# Altium PCB board.PcbDoc
Units mm, origin at the board's own origin, x right, y up, seen from the top; angles counter-clockwise.
Board outline 130 x 90 mm, 2 copper layers (Top Layer, Bottom Layer); 52 components, 31 nets, 126 pads, 0 vias.
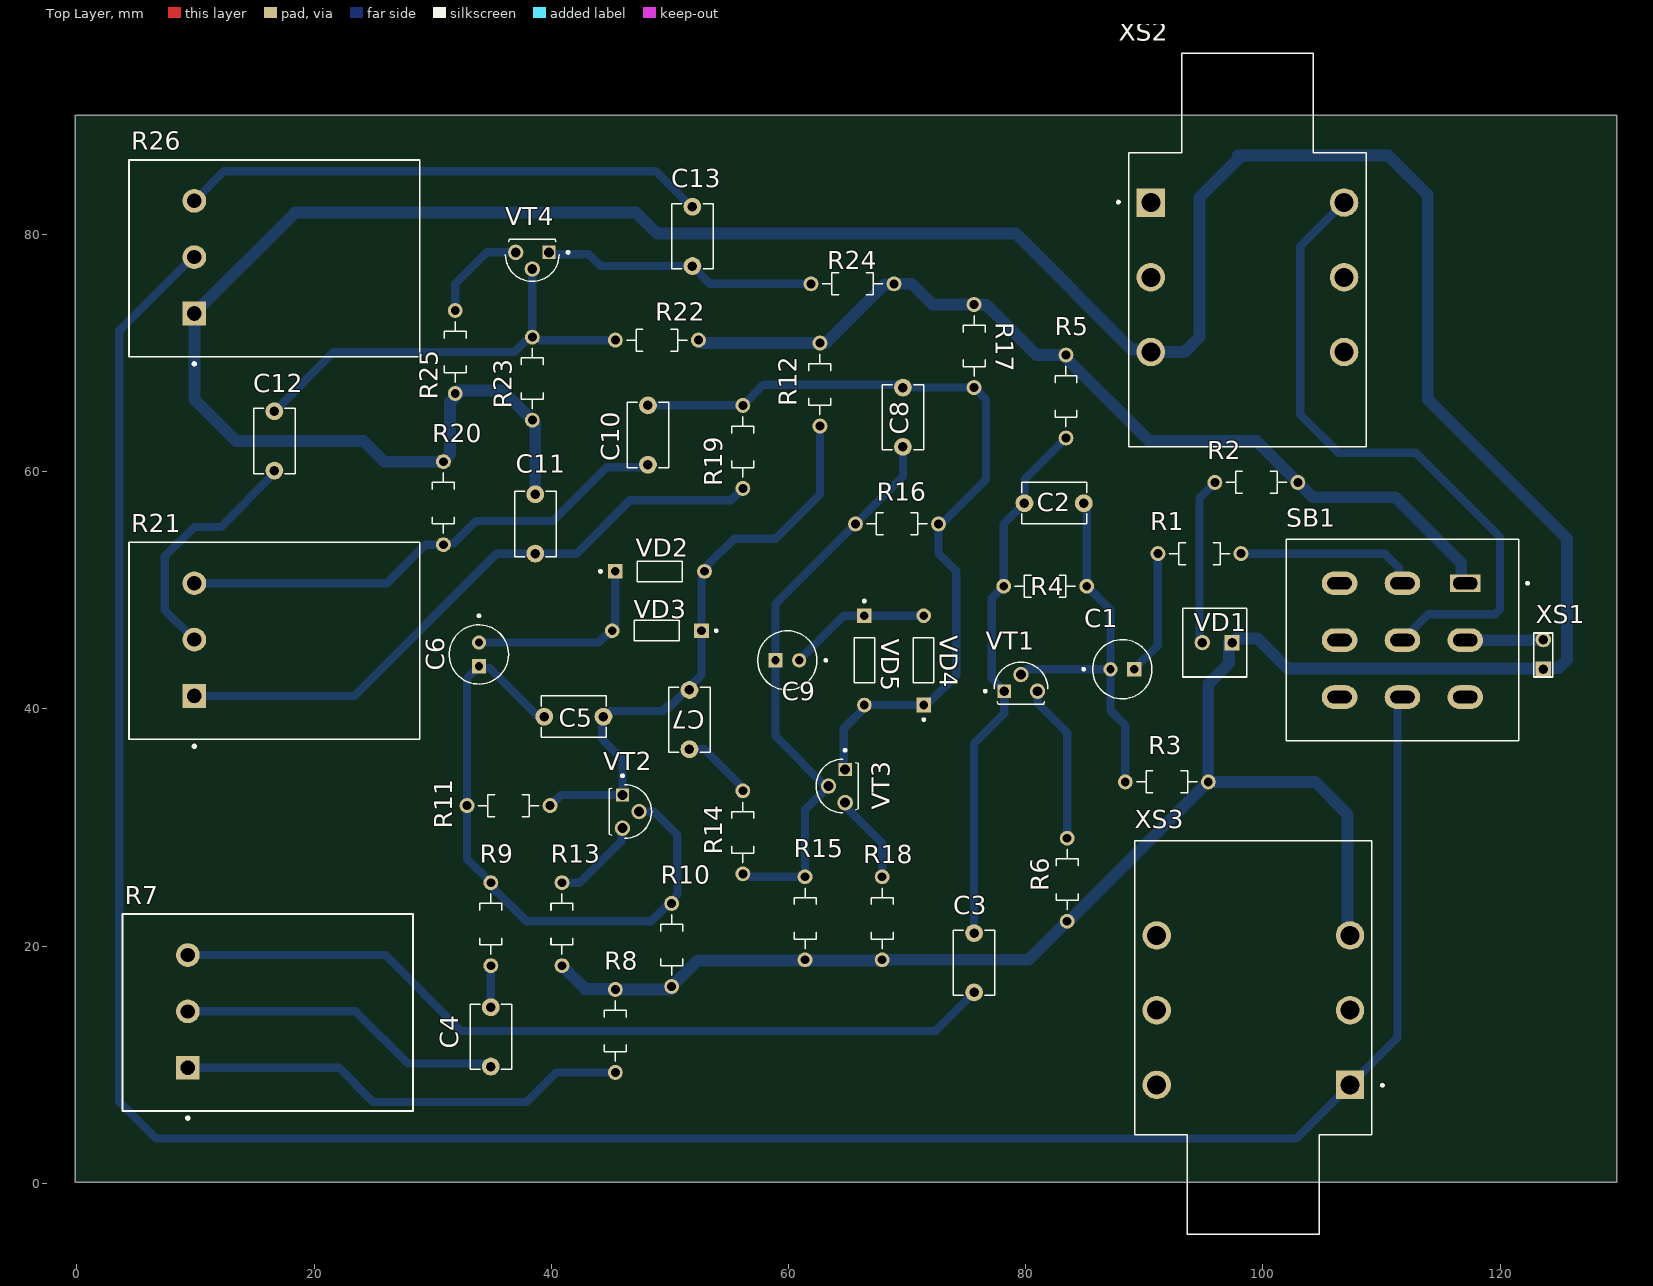
[diagram p0: Top Layer view]
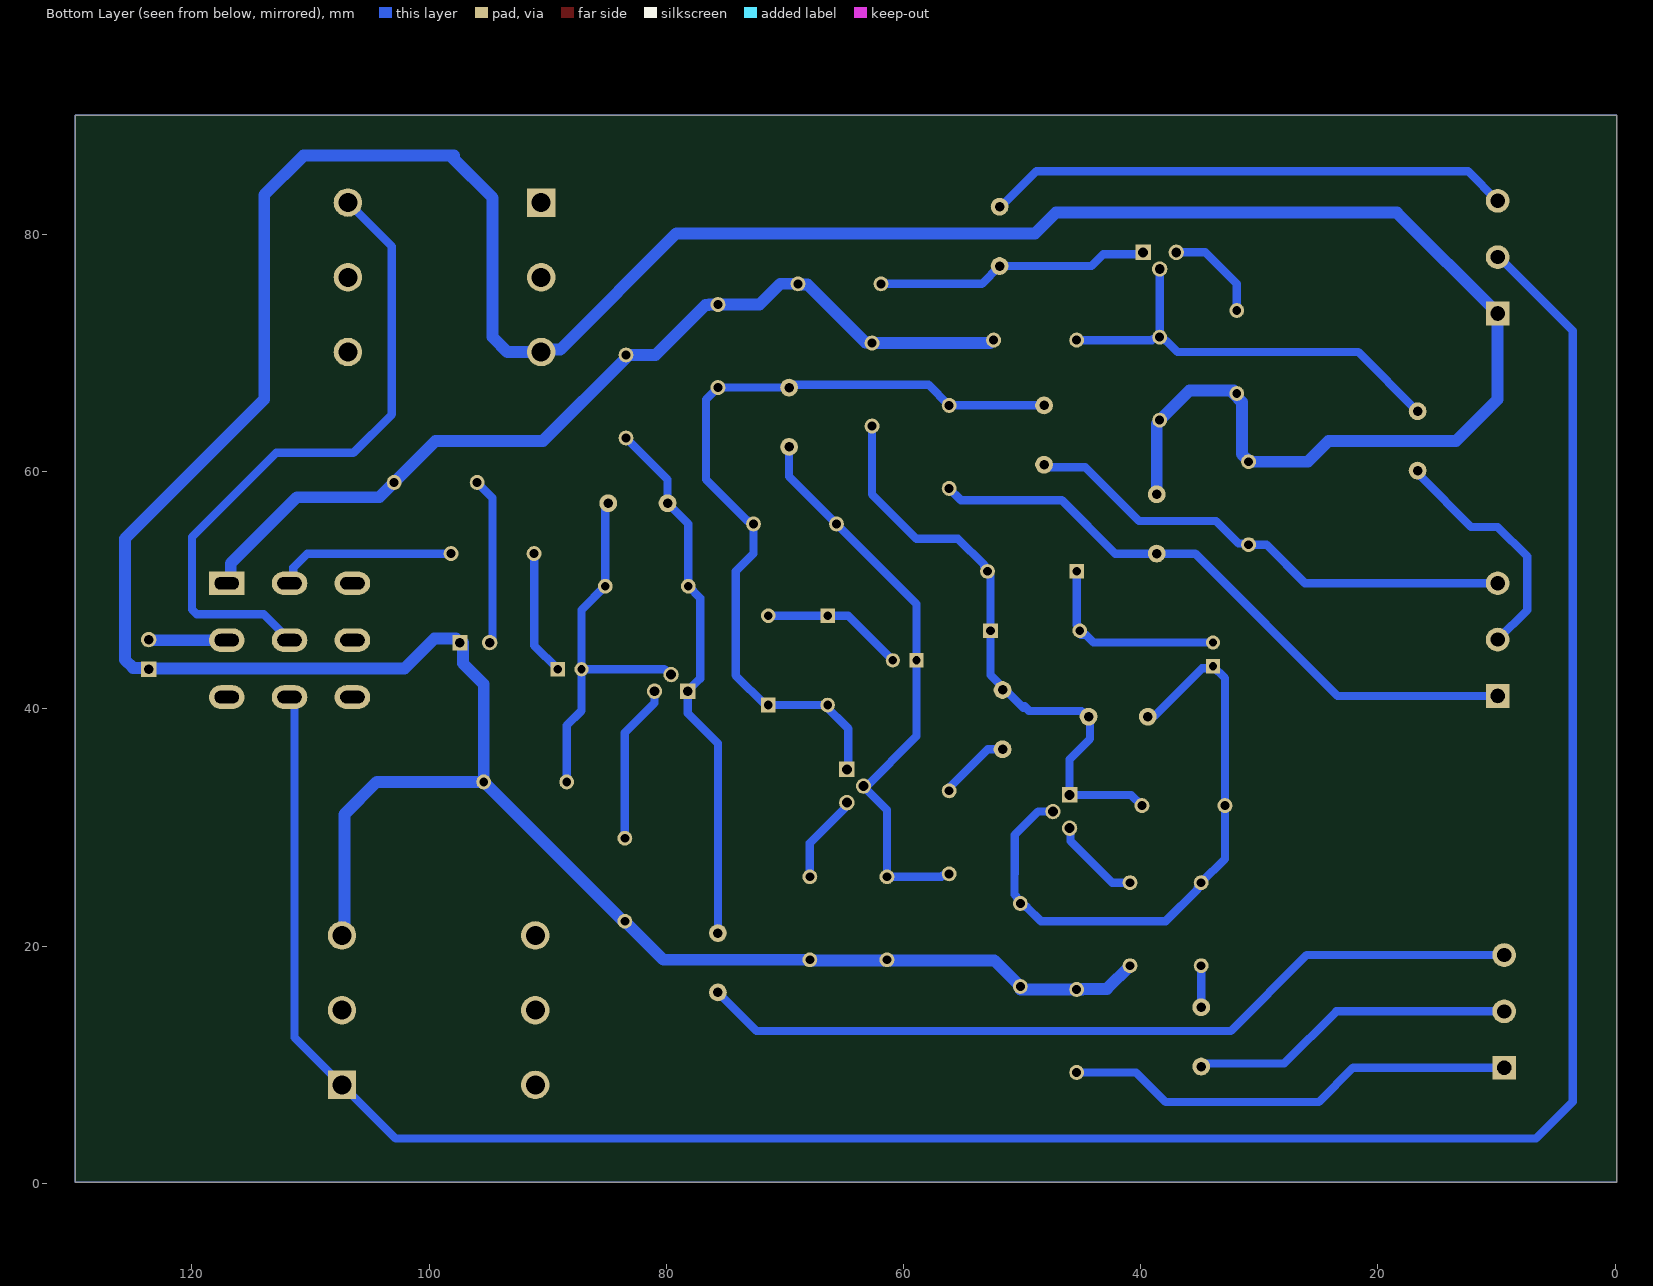
[diagram p1: Bottom Layer view, seen from below]
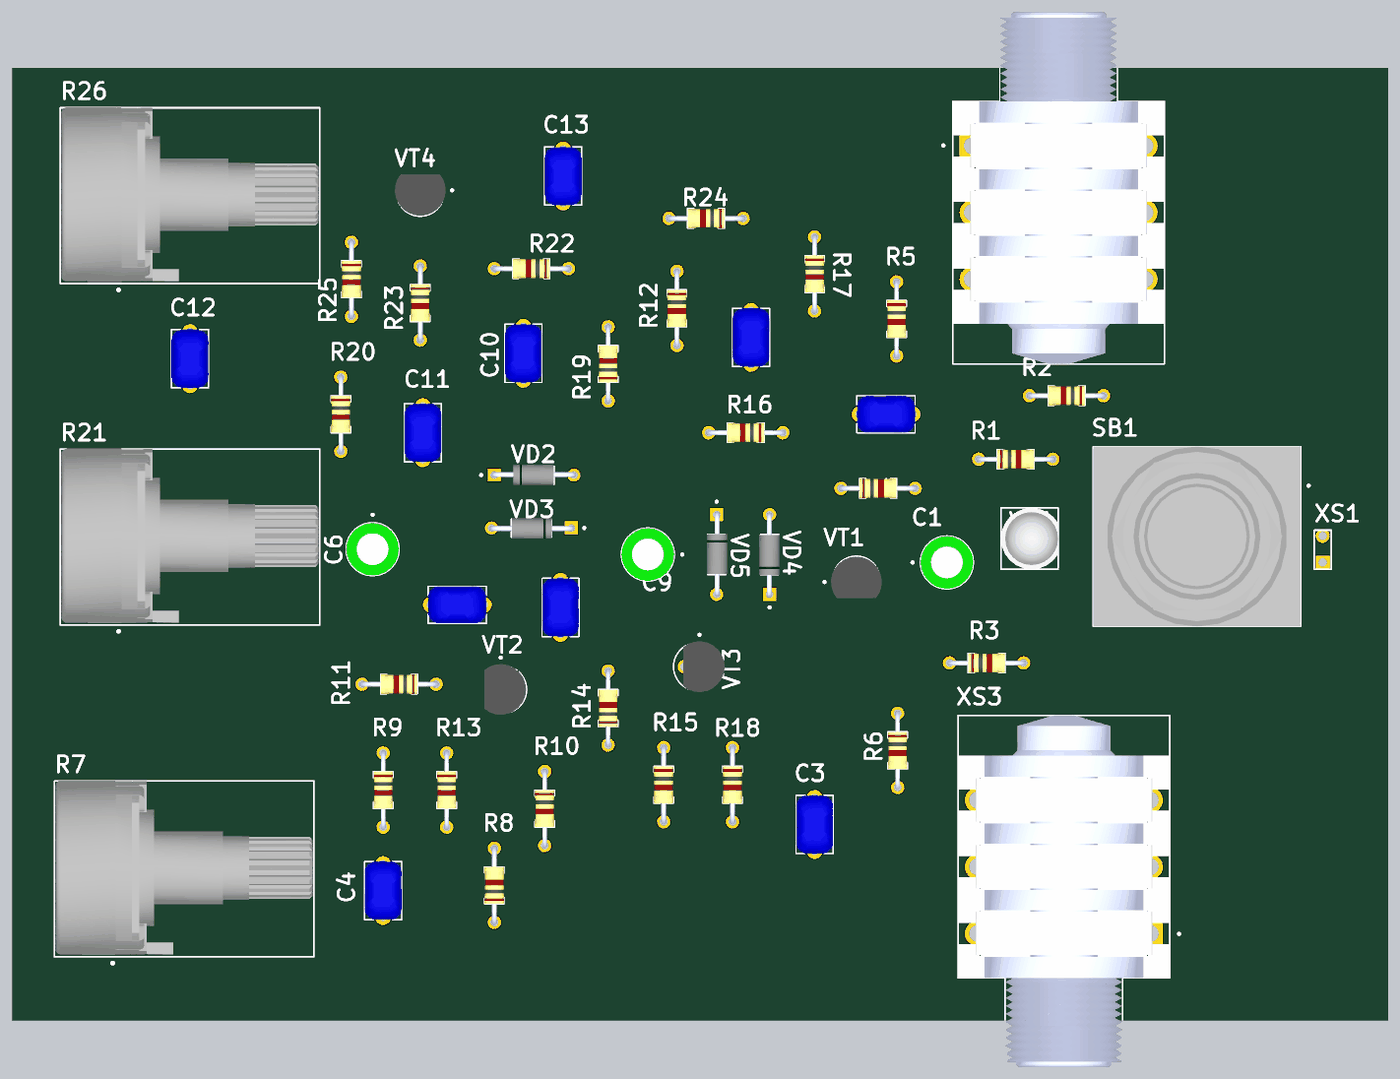
[diagram p2: 3D render of the assembled board from above, using the file's embedded part models]

## Layer stack, top to bottom
Top Solder: solder mask 0.0102, Solder Resist, Dk 3.5
Top Layer: signal copper 0.0356
Dielectric 1: dielectric 0.32, FR-4, Dk 4.8
Bottom Layer: signal copper 0.0356
Bottom Solder: solder mask 0.0102, Solder Resist, Dk 3.5

## Board outline
-0.15,0.075 -0.15,90.075 129.85,90.075 129.85,0.075

## Design rules (kind name [scope] priority, off if disabled: settings)
Clearance [All] p1: gap=0 ignorepadtopadclearanceinfootprint=TRUE
Height [All] p1: minheight=0 maxheight=100 prefheight=12.7
PolygonConnect [All] p1: connectstyle=Relief reliefconductorwidth=0.254 reliefentries=4 polygonreliefangle="90 Angle" airgapwidth=0.254
RoutingVias [All] p1: holewidth=0.711 width=1.27 viastyle="Through Hole" minholewidth=0.711 minwidth=1.27 maxholewidth=0.711 maxwidth=1.27
SolderMaskExpansion [All] p1: expansion=0.102 istentingtop=FALSE
Width [All] p1: maxlimit=1 minlimit=0.7 preferedwidth=0.7
29 further rules are at their usual default settings.

## Components (designator, comment, footprint, x,y, rotation, side; value= is the part's Value field where it differs from the comment)
C1 "1 мкФ" CE 88.15,43.35 r0 top
C2 "470 пФ" СC 82.4,57.35 r180 top
C3 "1 мкФ" СC 75.65,18.6 r270 top
C4 "100 нФ" СC 34.9,12.35 r90 top
C5 "470 пФ" СC 41.9,39.35 r0 top
C6 "1 мкФ" CE 33.9,44.6 r270 top
C7 "100 нФ" СC 51.65,39.1 r270 top
C8 "470 пФ" СC 69.65,64.6 r90 top
C9 "1 мкФ" CE 59.9,44.1 r180 top
C10 "4 нФ" СC 48.15,63.1 r270 top
C11 "10 нФ" СC 38.65,55.6 r270 top
C12 "100 нФ" СC 16.65,62.6 r270 top
C13 "100 нФ" СC 51.9,79.85 r270 top
R1 "39 кОм" R 94.65,53.1 r180 top
R2 "390 Ом" R 99.45,59.1 r0 top
R3 "47 кОм" R 91.9,33.85 r180 top
R4 "470 кОм" R 81.65,50.35 r180 top
R5 "10 кОм" R 83.4,66.35 r90 top
R6 "100 Ом" R 83.5,25.6 r90 top
R7 "100 кОм" RP 9.35,14.5 r90 top
R8 "1 кОм" R 45.4,12.85 r270 top
R9 "10 кОм" R 34.9,21.85 r90 top
R10 "100 кОм" R 50.15,20.1 r90 top
R11 "470 кОм" R 36.4,31.85 r0 top
R12 "10 кОм" R 62.65,67.35 r90 top
R13 "150 Ом" R 40.9,21.85 r90 top
R14 "10 кОм" R 56.15,29.6 r270 top
R15 "100 кОм" R 61.4,22.35 r90 top
R16 "470 кОм" R 69.15,55.6 r0 top
R17 "10 кОм" R 75.65,70.6 r90 top
R18 "150 Ом" R 67.9,22.35 r90 top
R19 "39 кОм" R 56.15,62.1 r270 top
R20 "22 кОм" R 30.9,57.35 r90 top
R21 "100 кОм" RP 9.9,45.85 r90 top
R22 "430 кОм" R 48.9,71.1 r0 top
R23 "100 кОм" R 38.4,67.85 r90 top
R24 "15 кОм" R 65.4,75.85 r0 top
R25 "3,3 кОм" R 31.9,70.1 r90 top
R26 "100 кОм" RP 9.9,78.1 r90 top
SB1 "3PDT" 3PDT 111.771,45.8 r180 top
VD1 "Led" LED 96.15,45.6 r0 top
VD2 "Diode" D 49.15,51.6 r0 top
VD3 "Diode" D 48.9,46.6 r180 top
VD4 "Diode" D 71.4,44.1 r90 top
VD5 "Diode" D 66.4,44.1 r270 top
VT1 "Transistor" BC239C#1 79.6,41.5 r0 top
VT2 "Transistor" BC239C#1 46,31.35 r270 top
VT3 "Transistor" BC239C#2 64.775,33.5 r270 top
VT4 "Transistor" BC239C#1 38.4,78.5 r180 top
XS1 "Connector +9V" CON 123.65,44.6 r90 top
XS2 "Connector Jack IN" TRS_6.3mm 98.7,82.7 r270 top
XS3 "Connector Jack OUT" TRS_6.3mm 99.2,8.3 r90 top

## Footprints (in the part's own frame and the unit in brackets; to place one, negate y for a bottom-side part, rotate by r counter-clockwise, add the part's x,y. Pads: shape width x height; smd on the part's side, far side on the other; paste and mask are expansions set on the pad)
3PDT [mm]
  rect 2.6x1.5 / inner oval 2.6x1.6 / far side rect 3x2 hole 1.05 slot 2.05 at 0 deg: 1(-5.3,-4.8)
  oval 3x2 hole 1.05 slot 2.05 at 0 deg unplated: 2(-5.3,0) 3(-5.3,4.8) 4(0,-4.8) 5(0,0) 6(0,4.8) 7(5.3,-4.8) 8(5.3,0) 9(5.3,4.8)
  silkscreen extent -10.65,-8.5 9.8,8.5, body extent -9.8,-8.5 9.8,8.5, height 38.5
BC239C#1 [mm] "TO-92"
  rect 1.12x1.12 / inner round 1.12 / far side rect 1.3x1.3 hole 0.83: 1(-1.4,0)
  round 1.3 hole 0.83: 2(0,1.4) 3(1.4,0)
  silkscreen extent -3.11,-1.1 2.26,2.45, body extent -2.4,-1.52 2.4,2.41, height 5.49
BC239C#2 [mm] "TO-92"
  rect 1.12x1.12 / inner round 1.12 / far side rect 1.3x1.3 hole 0.83: 1(-1.4,0)
  round 1.3 hole 0.83: 2(0,-1.4) 3(1.4,0)
  silkscreen extent -3.11,-2.45 2.26,1.1, body extent -2.4,-1.54 2.4,2.39, height 5.49
CE [mm] "50v 1uF"
  rect 1.2x1.2 hole 0.7: 1(1,0)
  round 1.2 hole 0.7: 2(-1,0)
  silkscreen extent -3.35,-2.5 2.5,2.5, body extent -2.5,-2.5 2.5,2.5, height 12
CON [mm]
  rect 1.3x1.3 hole 0.8 paste-2539.97 mask+0.102: 1(-1.25,0)
  round 1.3 hole 0.8 paste-2539.97 mask+0.102: 2(1.25,0)
  silkscreen extent -1.9,-0.8 1.8,0.8
D [mm] "1N914"
  rect 1.238x1.238 / inner round 1.238 / far side rect 1.238x1.238 hole 0.73: 1(-3.768,0)
  round 1.238 hole 0.73: 2(3.768,0)
  silkscreen extent -5.1,-0.86 1.9,0.86, body extent -4.05,-0.92 3.96,0.99, height 1.9
LED [mm]
  rect 1.3x1.3 hole 0.8 paste-2539.97 mask+0.102: 1(1.25,0)
  round 1.3 hole 0.8 paste-2539.97 mask+0.102: 2(-1.25,0)
  silkscreen extent -2.9,-2.9 2.5,2.9, body extent -2.9,-2.9 2.5,2.9, height 9.6
R [mm]
  round 1.258 hole 0.75: 1(-3.5,0) 2(3.5,0)
  silkscreen extent -2.55,-0.92 2.55,0.92, body extent -3.72,-0.92 3.72,0.92, height 1.85
RP [mm]
  rect 2x2 hole 1.2 paste-2539.97 mask+0.102: 1(-4.75,0)
  round 2 hole 1.2 paste-2539.97 mask+0.102: 2(0,0) 3(4.75,0)
  silkscreen extent -9.1,-19 8.2,5.5, body extent -8.25,-18.9 8.25,5.4, height 21.25
TRS_6.3mm [mm]
  rect 2.4x2.4 / inner round 2.4 / far side rect 2.4x2.4 hole 1.6: 1(0,-8.15)
  round 2.4 hole 1.6: 2(12.6,-8.15) 3(6.3,-8.15) 4(0,8.15) 5(12.6,8.15) 6(6.3,8.15)
  silkscreen extent -12.6,-10.98 20.6,10, body extent -12.6,-10 20.6,10, height 15.74
СC [mm]
  round 1.5 hole 0.8: 1(-2.5,0) 2(2.5,0)
  silkscreen extent -2.75,-1.75 2.75,1.75, body extent -2.75,-1.75 2.75,1.75, height 6

## Part data
C1 C6 C9: library part "Capacitor Electrolytic"
C2 C3 C4 C5 C7 C8 C10 C11 C12 C13: library part "Capacitor Ceramic"
R1 R2 R3 R4 R5 R6 R8 R9 R10 R11 R12 R13 R14 R15 R16 R17 R18 R19 R20 R22 R23 R24 R25: library part Resistor
R7 R21 R26: library part Potentiometer
VD1: "RED"

## Nets (pads, with @x,y where several pads share a name; then routed paths per layer and width w, separated by ;. In a path a pad name is that pad's centre, name@x,y a point inside that pad or via, vN(x,y) a via of type N, cw(c..) or ccw(c..) an arc to the next point about the centre after c; other vN are vias at no path point)
GND: C11.1 R3.1 R6.1 R8.1 R10.1 R13.1 R15.1 R18.1 R20.2 R23.1 R25.1 R26.1 VD1.1 XS1.1 XS2.2 XS3.2 | length 349.3
  Bottom Layer w1: R25.1@32.15,66.719 32.15,66.565 31.47,65.885 31.47,61.49 30.9,60.92 R20.2 25.9,60.85 24.15,62.6 13.4,62.6 9.9,66.1 R26.1 18.4,81.85 47.15,81.85 48.9,80.1 79.15,80.1 88.941,70.309 90.341,70.309 XS2.2 93.4,70.1 94.65,71.35 94.65,83.1 98.05,86.5 ; R25.1@32.15,66.85 35.9,66.85 R23.1 38.4,64.28 38.65,64.03 C11.1 ; R13.1 42.851,16.399 44.851,16.399 44.9,16.35 R8.1 R10.1@50.15,16.35 ; R10.1@50.15,16.481 R10.1@50.269,16.6 ; R10.1 52.351,18.801 R15.1@61.281,18.801 ; R15.1@61.519,18.801 67.851,18.801 R18.1 ; R18.1@68.314,18.85 80.25,18.85 R6.1 83.57,22.1 83.699,22.229 83.779,22.229 R3.1 ; VD1.1@97.15,45.6 97.15,43.85 95.4,42.1 R3.1 ; VD1.1 97.736,45.936 99.564,45.936 102.075,43.425 123.5,43.425 XS1.1@123.65,43.275 ; 97.9,86.675 110.6,86.675 ; XS3.2 107.15,21.1 107.15,31.1 104.4,33.85 R3.1 ; 110.75,86.5 113.9,83.35 113.9,66.1 125.65,54.35 125.65,44.15 124.961,43.461 123.761,43.461 XS1.1
NetC1_1: C1.1 R1.2 | length 10.6
  Bottom Layer w0.7: C1.1 91.15,45.35 R1.2
NetC1_2: C1.2 C2.1 R3.2 R4.1 VT1.2 | length 32.8
  Bottom Layer w0.7: VT1.2 79.714,42.9 80.164,43.35 86.805,43.35 87.055,43.1 C1.2@87.15,43.1 ; C2.1 84.9,57.228 85.15,56.978 R4.1 87.15,48.35 C1.2 C1.2@87.15,43.1 ; R3.2 88.4,38.6 87.15,39.85 C1.2@87.15,43.1
NetC2_2: C2.2 C3.1 R4.2 R5.1 VT1.1 | length 45.8
  Bottom Layer w0.7: C3.1 75.65,37.1 78.2,39.65 VT1.1 77.15,42.55 77.15,49.35 R4.2 78.15,55.6 C2.2 79.9,59.35 R5.1
NetC3_2: C3.2 R7.3 | length 70.3
  Bottom Layer w0.7: R7.3 26,19.25 32.4,12.85 72.4,12.85 C3.2
NetC4_1: C4.1 R7.2 | length 27.5
  Bottom Layer w0.7: R7.2 23.5,14.5 27.9,10.1 34.528,10.1 34.778,9.85 C4.1
NetC4_2: C4.2 R9.1 | length 3.5
  Bottom Layer w0.7: C4.2 R9.1
NetC5_1: C5.1 C6.1 R9.2 R10.2 R11.1 VT2.2 | length 54
  Bottom Layer w0.7: R9.2@34.9,25.199 35.179,24.92 35.179,24.821 37.9,22.1 48.4,22.1 49.621,23.321 49.72,23.321 50.025,23.626 50.025,23.725 50.124,23.725 50.429,24.03 50.429,24.129 50.65,24.35 50.65,26.1 50.632,26.118 50.632,29.368 48.65,31.35 VT2.2 ; R9.2 32.9,27.35 R11.1 32.9,42.6 C6.1 34.075,43.425 34.825,43.425 38.814,39.436 39.314,39.436 C5.1
NetC5_2: C5.2 C7.1 R11.2 R12.1 VD2.2 VD3.1 VT2.1 | length 50.4
  Bottom Layer w0.7: R11.2 40.8,32.75 VT2.1 46,35.75 44.272,37.478 44.272,38.904 44.314,38.946 C5.2@44.314,39.558 ; C5.2 44.522,39.35 44.997,39.825 49.442,39.825 ; 49.375,39.825 49.775,40.225 ; 49.9,40.1 51.65,41.85 52.668,42.868 VD3.1 VD2.2@52.668,51.204 ; VD2.2 52.918,51.746 53.187,52.015 53.187,52.137 55.4,54.35 58.9,54.35 62.65,58.1 R12.1
NetC6_2: C6.2 VD2.1 VD3.2 | length 16.3
  Bottom Layer w0.7: C6.2 43.986,45.6 44.633,46.247 45.029,46.247 VD3.2@45.131,46.35 ; VD3.2@45.008,46.578 45.214,46.578 45.234,46.599 45.234,46.934 45.381,47.082 VD2.1@45.381,51.1
NetC7_2: C7.2 R14.1 | length 6.3
  Bottom Layer w0.7: C7.2 52.9,36.6 56.043,33.457 56.043,33.358 56.315,33.086 R14.1@56.408,33.086
NetC8_1: C8.1 C9.1 R14.2 R15.2 R16.1 VT3.2 | length 48.8
  Bottom Layer w0.7: R14.2@56.052,26.198 56.257,25.993 56.651,25.993 56.795,25.85 R15.2 61.4,31.5 63.25,33.35 58.9,37.7 C9.1 58.9,48.85 R16.1 69.65,59.6 C8.1
NetC8_2: C8.2 C10.1 R16.2 R17.1 R19.1 VD4.1 VD5.2 VT3.1 | length 69.7
  Bottom Layer w0.7: C10.1 R19.1 57.9,67.35 C8.2@69.65,67.35 ; VT3.1@64.65,34.75 64.65,38.331 66.65,40.331 71.65,40.331 74.15,42.831 74.15,51.6 72.65,53.1 R16.2 ; C8.2 R17.1 76.65,66.1 76.65,59.35 73.179,55.879 R16.2@73.08,55.879
NetC9_2: C9.2 VD4.2 VD5.1 | length 12.3
  Bottom Layer w0.7: C9.2 64.668,47.868 66.65,47.868 VD4.2@71.65,47.868
NetC10_2: C10.2 R20.1 R21.3 | length 42.5
  Bottom Layer w0.7: R21.3 26.15,50.6 29.4,53.85 R20.1 31.007,53.957 31.757,53.957 33.65,55.85 40.15,55.85 44.675,60.375 48.15,60.375 C10.2
NetC11_2: C11.2 R19.2 R21.1 | length 53.5
  Bottom Layer w0.7: R21.1 23.4,41.1 35.4,53.1 C11.2 42.15,53.1 46.65,57.6 55.15,57.6 R19.2
NetC12_1: C12.1 R22.1 R23.2 VT4.2 | length 36.5
  Bottom Layer w0.7: C12.1 21.65,70.1 36.9,70.1 37.871,71.071 37.97,71.071 38.249,71.35 R23.2 ; VT4.2 R23.2 ; 44.749,71.1 39.045,71.1 38.901,71.243 38.507,71.243 R23.2
NetC12_2: C12.2 R21.2 | length 20.4
  Bottom Layer w0.7: R21.2 7.4,48.35 7.4,52.85 9.9,55.35 12.15,55.35 16.425,59.625 16.425,59.753 16.65,59.978 C12.2
NetC13_1: C13.1 R26.3 | length 44.3
  Bottom Layer w0.7: R26.3 12.4,85.35 48.778,85.35 51.778,82.35 C13.1
NetC13_2: C13.2 R24.1 VT4.1 | length 23.2
  Bottom Layer w0.7: VT4.1 39.95,78.35 43.15,78.35 44.15,77.35 C13.2 53.4,75.85 R24.1
NetR1_1: R1.1 SB1.4 | length 15.2
  Bottom Layer w0.7: R1.1 110.275,53.1 111.45,51.925 111.45,50.921 SB1.4
NetR2_1: R2.1 VD1.2 | length 14.1
  Bottom Layer w0.7: VD1.2 94.9,45.681 94.65,45.931 94.65,57.8 R2.1
NetR2_2: R2.2 R5.2 R12.2 R17.2 R22.2 R24.2 SB1.1 | length 78.3
  Bottom Layer w1: R22.2 52.47,71.1 52.72,70.85 R12.2 62.699,70.899 63.199,70.899 68.101,75.801 68.851,75.801 R24.2 70.4,75.85 72.15,74.1 76.4,74.1 76.449,74.051 76.699,74.051 80.9,69.85 R5.2 83.449,69.801 83.449,69.551 90.4,62.6 99.45,62.6 R2.2 104.2,57.85 111.15,57.85 116.725,52.275 116.725,50.85 116.975,50.6 SB1.1
NetR6_2: R6.2 VT1.3 | length 13.4
  Bottom Layer w0.7: VT1.3 81,40.5 83.5,38 R6.2
NetR7_1: R7.1 R8.2 | length 38.3
  Bottom Layer w0.7: R7.1 22.079,9.75 24.979,6.85 37.9,6.85 40.4,9.35 R8.2
NetR13_2: R13.2 VT2.3 | length 7.6
  Bottom Layer w0.7: R13.2@40.869,25.35 42.4,25.35 45.92,28.87 45.92,29.87 VT2.3
NetR18_2: R18.2 VT3.3 | length 7.4
  Bottom Layer w0.7: VT3.3@64.65,31.95 67.9,28.7 R18.2
NetR25_2: R25.2 VT4.3 | length 8.4
  Bottom Layer w0.7: R25.2 31.9,75.85 34.55,78.5 VT4.3
NetR26_2: R26.2 SB1.6 XS3.1 | length 215
  Bottom Layer w0.7: R26.2 9.775,78.1 3.575,71.9 3.575,6.875 6.675,3.775 102.825,3.775 106.5,7.45 107.15,8.1 111.35,12.3 SB1.6@111.35,40.8
NetSB1_2: SB1.2 XS1.2 | length 6.5
  Bottom Layer w1: SB1.2 XS1.2@123.6,45.8
NetSB1_5: SB1.5 XS2.4 | length 56.1
  Bottom Layer w0.7: XS2.4 103.15,79 103.15,64.85 106.4,61.6 112.9,61.6 120,54.5 120,48.385 119.59,47.975 113.946,47.975 112.424,46.453 112.424,46.17 112.054,45.8 SB1.5
pads on no net: SB1.3 SB1.7 SB1.8 SB1.9 XS2.1 XS2.3 XS2.5 XS2.6 XS3.3 XS3.4 XS3.5 XS3.6
copper on no net: | length 440
  Bottom Layer w0.015: -0.15,0.075 129.85,0.075 129.85,90.075 -0.15,90.075 -0.15,0.075